# Altium PCB Full bridge-V1.00.PcbDoc (part 2 of 2)
Units mil, origin at the board's own origin, x right, y up, seen from the top; angles counter-clockwise.
Board outline 14960.63 x 6692.91 mil, 2 copper layers (Top Layer, Bottom Layer); 452 components, 175 nets, 980 pads, 0 vias.
Unrouted connection lines stored in the file: 781.
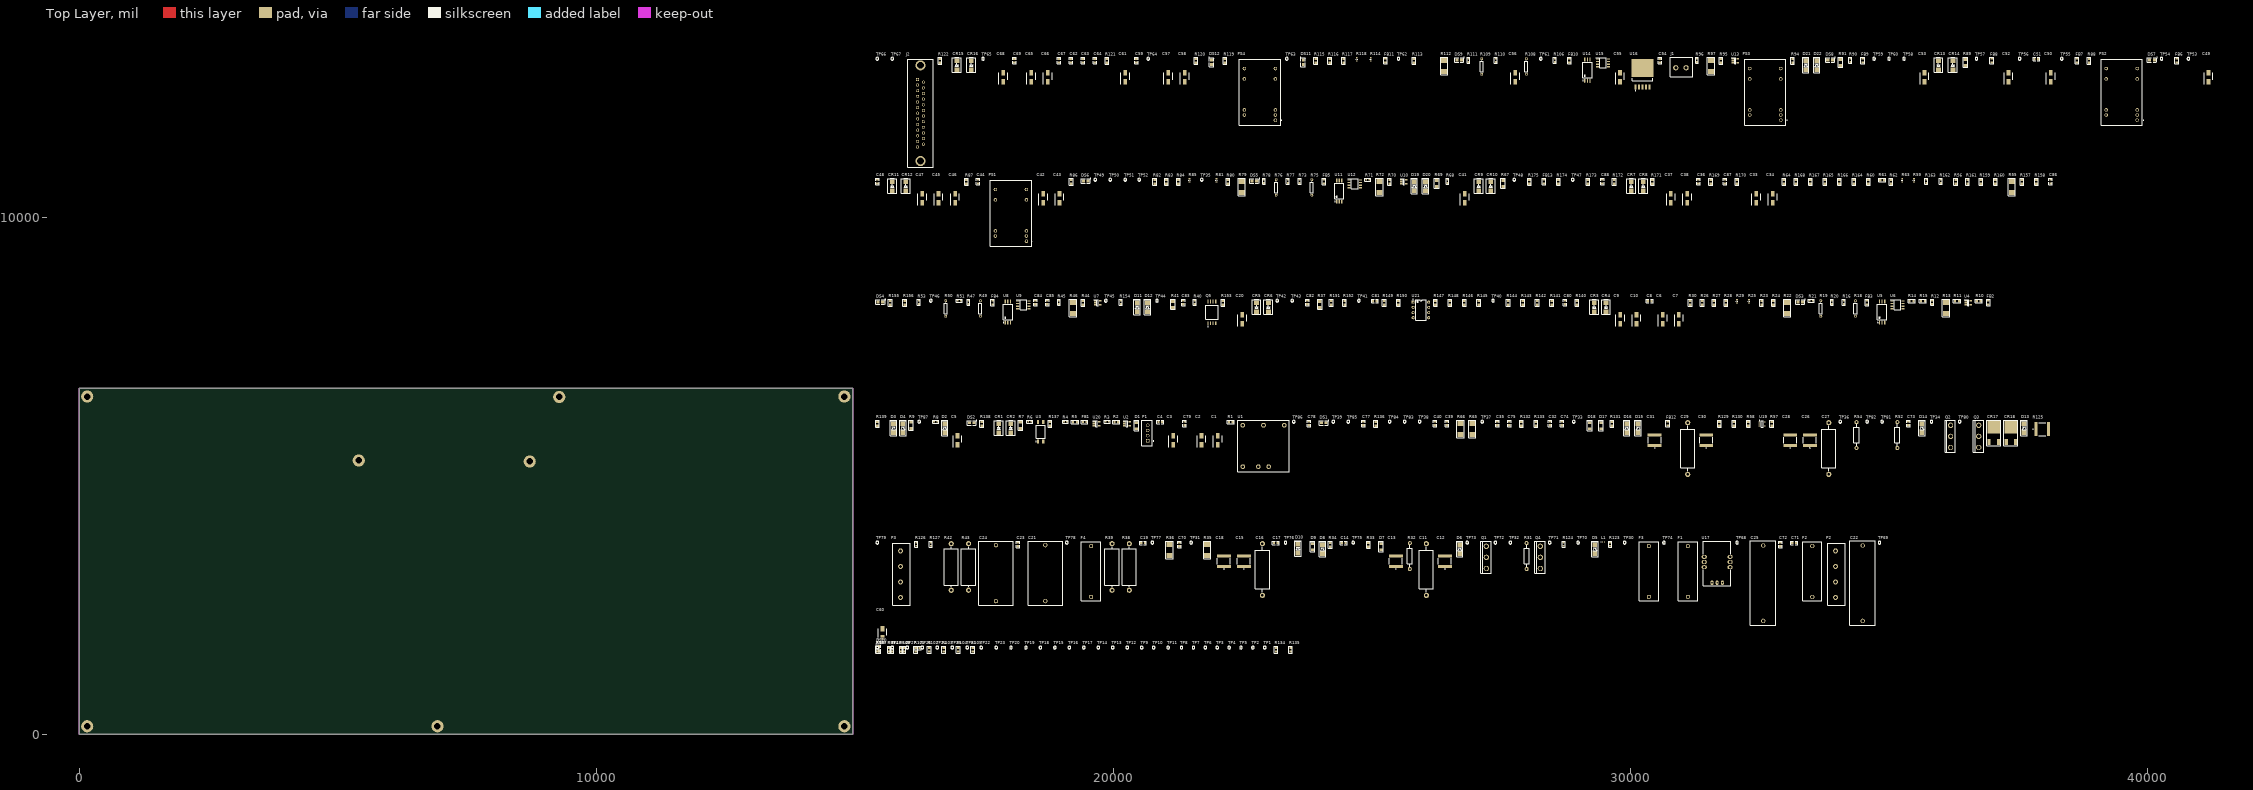
[diagram p0: Top Layer view]

## Nets (pads, with @x,y where several pads share a name; then routed paths per layer and width w, separated by ;. In a path a pad name is that pad's centre, name@x,y a point inside that pad or via, vN(x,y) a via of type N, cw(c..) or ccw(c..) an arc to the next point about the centre after c; other vN are vias at no path point)
1.65V: C79.2 R135.2 R146.1 TP86.1 U20.5
3: J2.12 TP66.1
4: J2.24 TP67.1
+3.3VD: C73.2 R2.2 R11.2 R44.2 R70.2 R95.2 R140.1 R150.2 R171.1 U19.5
+3.3VD2: C60.1 C64.2 DS10.1 R14.1 R92.2 TP26.1 U16.4 U16.5
+5V_MICRO: C69.2 C71.2 C72.2 C78.2 DS12.1 FB11.1 J2.13 J2.25 R3.1 R12.1 R15.1 R45.1 R71.1 R93.2 R96.1 R138.1 R144.1 R149.2 R172.2 TP25.1 TP63.1 U17.13 U20.1
"+12V_Digital IN": C2.1 C49.1 C52.1 C56.1 C68.1 J1.1 PS1.22 PS1.23 PS2.22 PS2.23 PS3.22 PS3.23 PS4.22 PS4.23 TP55.1 U1.1
+VDDI: R92.1 R93.1
"AC Output": F2.2 P2.1 P2.2 R141.1 TP69.1
"E FB TEMP": J2.8
Fan: C3.1 C4.2 D1.1 DS1.1 P1.1 U1.3
"Fan FB command": FB1.1 J2.23
"FB TEMP of the heatsink": FB2.2 J2.16
"Gate 1": D8.2 Q1.1 R7.2 R9.2 R19.2 R33.2 TP71.1
"Gate 2": D15.2 Q2.1 R37.2 R41.2 R50.2 R57.2 TP79.1
"Gate 3": D16.2 Q3.1 R58.2 R67.2 R69.2 R76.2 TP80.1
"Gate 4": D10.2 Q4.1 R34.2 R89.2 R91.2 R109.2 TP73.1
"GND side FB": C21.1 C24.1 C26.2 C27.2 C28.2 C29.2 C30.2 C31.2 C32.1 C35.1 C37.2 C38.2 C39.1 C40.1 C45.2 C46.2 CR7.1 CR11.1 CR17.1 D13.1 D14.1 D15.1 D16.1 D17.1 D18.1 P3.3 P3.4 Q2.3 Q3.3 R40.1 R42.2 R43.2 R51.1 R57.1 R58.1 R64.1 R65.2 R66.2 R68.1 R77.1 R86.1 R125.1 R167.2 R168.2 TP33.1 TP83.1 TP84.1 TP85.1 U9.4 U9.5 U12.4 U12.5
GND_DIGITAL: C1.2 C5.2 C20.2 C41.2 C53.2 C60.2 C62.1 C63.1 C64.1 C69.1 C71.1 C72.1 C73.1 C75.1 C77.1 C78.1 C79.1 C80.2 C82.2 C83.2 C86.2 J2.1 J2.14 Q5.5 R6.1 R10.2 R21.1 R23.2 R24.2 R25.1 R26.2 R27.2 R28.2 R29.1 R53.1 R56.2 R59.1 R60.2 R61.2 R62.2 R63.1 R78.1 R80.2 R81.1 R82.2 R83.2 R84.2 R85.1 R98.2 R99.2 R100.2 R101.2 R102.2 R103.2 R104.2 R105.2 R111.1 R113.2 R114.1 R115.2 R116.2 R117.2 R118.1 R121.2 R122.2 R124.1 R129.1 R134.2 R136.1 R137.2 R139.2 R143.2 R145.1 R160.2 R164.2 R175.2 TP8.1 TP14.1 TP20.1 TP28.1 TP29.1 TP32.1 TP38.1 TP39.1 TP48.1 TP64.1 TP87.1 U2.3 U3.2 U4.3 U5.3 U7.3 U8.3 U10.3 U11.3 U13.3 U14.3 U16.3 U16.6 U17.12 U20.2
GND_Fan: C3.2 C4.1 D2.1 P1.2 R1.2 TP2.1 U1.5
GND_GS1: C6.2 C7.2 C8.1 C19.2 C47.2 C48.1 CR2.1 PS1.16 R8.2 R20.2 R35.1 R87.2 TP6.1 TP53.1 U5.4
GND_GS2: C33.2 C34.2 C36.1 C39.2 C50.2 C51.1 CR6.1 PS2.16 R40.2 R51.2 R65.1 R88.2 TP12.1 TP56.1 U8.4
GND_GS3: C40.2 C42.2 C43.2 C44.1 C54.1 C55.2 CR10.1 PS3.16 R66.1 R68.2 R77.2 R94.2 TP18.1 TP61.1 U11.4
GND_GS4: C23.2 C57.2 C58.2 C59.1 C61.2 C67.1 CR14.1 PS4.16 R36.1 R90.2 R110.2 R119.2 TP24.1 TP65.1 U14.4
"GND_High voltage-out": L1.2 P2.3 P2.4 R151.1 R152.1 R154.2 R162.1 R163.1 TP42.1 TP74.1
GND_IN: C2.2 C49.2 C52.2 C56.2 C68.2 J1.2 PS1.2 PS1.3 PS2.2 PS2.3 PS3.2 PS3.3 PS4.2 PS4.3 TP57.1 U1.2 U3.3
"High side FB": C24.2 D5.2 D6.2 F1.2 Q1.2 Q4.2 R31.2 R32.2 R142.1 TP68.1
"Input 400V": F4.1 P3.1 P3.2 R125.2 TP31.1
"Input voltage of FB": J2.15 TP59.1
"M1 FB command": FB3.1 FB9.2 R26.1 R105.1 TP3.1 TP49.1
"M2 FB command": FB4.1 FB8.2 R60.1 R104.1 TP9.1 TP50.1
"M3 FB command": FB5.1 FB7.2 R82.1 R103.1 TP15.1 TP51.1
"M4 FB command": FB6.2 FB10.1 R102.1 R115.1 TP21.1 TP52.1
NetC1_1: C1.1 R2.1 R3.2 U2.5
NetC5_1: C5.1 R11.1 R12.2 U4.5
NetC11_1: C11.1 C12.1 C13.1 R31.1
NetC15_1: C15.1 C16.1 C18.1 R32.1
NetC20_1: C20.1 R44.1 R45.2 U7.5
NetC21_2: C21.2 CR18.1 F1.1 F4.2 R38.1 R39.1
NetC22_1: C22.1 C25.1 F2.1
NetC22_2: C22.2 C25.2 F3.2
NetC26_1: C26.1 C27.1 C28.1 R52.1
NetC30_1: C30.1 C31.1 R54.1
NetC41_1: C41.1 R70.1 R71.2 U10.5
NetC53_1: C53.1 R95.1 R96.2 U13.5
NetC62_2: C62.2 C63.2 FB11.2 U16.1 U16.2
NetC70_1: C70.1 R127.2 R131.1 U19.1
NetC70_2: C70.2 R126.1 R130.2 TP34.1 U19.4
NetC74_1: C74.1 R132.2 R133.1
NetC74_2: C74.2 R129.2 R130.1
NetC75_2: C75.2 FB12.1 R131.2 TP36.1
NetC77_2: C77.2 R133.2 R136.2 TP37.1 U19.3
NetC81_1: C81.1 Q5.6 R158.2 R159.1 TP44.1
NetC81_2: C81.2 R153.2
NetC82_1: C82.1 C83.1 Q5.8 R149.1 R150.1
NetC84_1: C84.1 Q5.2 R147.1 R148.1 R151.2 R152.2 TP41.1
NetC84_2: C84.2 C85.2 Q5.4 R154.1 R162.2 R168.1 TP46.1
NetC88_2: C88.2 R173.2 R174.1
NetCR1_1: CR1.1 CR2.2 R18.1 R30.2 TP5.1 U5.5
NetCR3_2: CR3.2 CR4.1 D3.2 D4.2 R13.1 R22.1 TP7.1 U6.6 U6.7
NetCR5_1: CR5.1 CR6.2 R49.1 R64.2 TP11.1 U8.5
NetCR7_2: CR7.2 CR8.1 D11.2 D12.2 R46.1 R55.1 TP13.1 U9.6 U9.7
NetCR9_1: CR9.1 CR10.2 R75.1 R86.2 TP17.1 U11.5
NetCR11_2: CR11.2 CR12.1 D19.2 D20.2 R72.1 R79.1 TP19.1 U12.6 U12.7
NetCR13_1: CR13.1 CR14.2 R108.1 R120.2 TP23.1 U14.5
NetCR15_2: CR15.2 CR16.1 D21.2 D22.2 R97.1 R112.1 TP27.1 U15.6 U15.7
NetCR17_2: CR17.2 CR18.2
NetD1_2: D1.2 D2.2
NetD3_1: D3.1 D4.1 R7.1 R9.1
NetD11_1: D11.1 D12.1 R37.1 R41.1
NetD19_1: D19.1 D20.1 R67.1 R69.1
NetD21_1: D21.1 D22.1 R89.1 R91.1
NetDS1_2: DS1.2 R1.1
NetDS2_1: DS2.1 R5.1 TP1.1 U2.4
NetDS2_2: DS2.2 R10.1
NetDS3_1: DS3.1 R17.1 TP4.1 U4.4
NetDS3_2: DS3.2 R28.1
NetDS4_1: DS4.1 R48.1 TP10.1 U7.4
NetDS4_2: DS4.2 R62.1
NetDS5_1: DS5.1 R74.1 TP16.1 U10.4
NetDS5_2: DS5.2 R84.1
NetDS6_2: DS6.2 R87.1
NetDS7_2: DS7.2 R88.1
NetDS8_2: DS8.2 R94.1
NetDS9_1: DS9.1 R107.1 TP22.1 U13.4
NetDS9_2: DS9.2 R117.1
NetDS10_2: DS10.2 R121.1
NetDS11_2: DS11.2 R119.1
NetDS12_2: DS12.2 R122.1
NetF3_1: F3.1 U17.8 U17.9 U17.10
NetFB1_2: FB1.2 R4.1
NetFB2_1: FB2.1 P1.4 R24.1
NetFB3_2: FB3.2 R16.1 R27.1
NetFB4_2: FB4.2 R47.1 R61.1
NetFB5_2: FB5.2 R73.1 R83.1
NetFB6_1: FB6.1 J2.21 R98.1
NetFB7_1: FB7.1 J2.9 R99.1
NetFB8_1: FB8.1 J2.22 R100.1
NetFB9_1: FB9.1 J2.10 R101.1
NetFB10_2: FB10.2 R106.1 R116.1
NetFB13_1: FB13.1 R174.2 R175.1
NetP1_3: P1.3 R14.2 R15.2
NetQ5_3: Q5.3 R163.2 R167.1
NetQ5_7: Q5.7 R153.1 R157.2 TP43.1
NetR4_2: R4.2 U2.2
NetR5_2: R5.2 U3.1
NetR6_2: R6.2 U2.1
NetR13_2: R13.2 R19.1 R22.2
NetR16_2: R16.2 U4.2
NetR17_2: R17.2 R23.1 U5.1
NetR18_2: R18.2 U6.2
NetR21_2: R21.2 U4.1
NetR25_2: R25.2 U5.2
NetR29_2: R29.2 U6.3
NetR38_2: R38.2 R42.1
NetR39_2: R39.2 R43.1
NetR46_2: R46.2 R50.1 R55.2
NetR47_2: R47.2 U7.2
NetR48_2: R48.2 R56.1 U8.1
NetR49_2: R49.2 U9.2
NetR53_2: R53.2 U7.1
NetR59_2: R59.2 U8.2
NetR63_2: R63.2 U9.3
NetR72_2: R72.2 R76.1 R79.2
NetR73_2: R73.2 U10.2
NetR74_2: R74.2 R80.1 U11.1
NetR75_2: R75.2 U12.2
NetR78_2: R78.2 U10.1
NetR81_2: R81.2 U11.2
NetR85_2: R85.2 U12.3
NetR97_2: R97.2 R109.1 R112.2
NetR106_2: R106.2 U13.2
NetR107_2: R107.2 R113.1 U14.1
NetR108_2: R108.2 U15.2
NetR111_2: R111.2 U13.1
NetR114_2: R114.2 U14.2
NetR118_2: R118.2 U15.3
NetR123_1: R123.1 R124.2 R132.1 TP30.1
NetR123_2: R123.2 U17.11
NetR126_2: R126.2 R127.1
NetR134_1: R134.1 R135.1 U19.2
NetR137_1: R137.1 U20.4
NetR138_2: R138.2 R139.1 U20.3
NetR141_2: R141.2 R142.2 R147.2 R148.2 TP40.1
NetR155_1: R155.1 R156.2
NetR156_1: R156.1 R160.1 R161.1
NetR161_2: R161.2 R166.1 R171.2 R172.1
NetR165_1: R165.1 R166.2
NetU1_6: U1.6 U3.4
"Output Current of FB to micro controller": FB12.2 J2.2
"Output voltage of FB": FB13.2 J2.3 TP47.1 TP60.1
"P1 OP37-2": R155.2 U21.1
"P2 OP37-2": C87.1 R158.1 R159.2 R169.2 R170.2 U21.2
"P3 OP37-2": C86.1 R157.1 R164.1 U21.3
"P4 OP37-2": R145.2 R146.2 U21.4
"P5 OP37-2": R143.1 U21.5
"P6 OP37-2": C87.2 C88.1 R169.1 R170.1 R173.1 TP45.1 U21.6
"P7 OP37-2": C80.1 R140.2 R144.2 U21.7
"P8 OP37-2": R165.2 U21.8
"Relay FB command": J2.11
"Source 1": C9.2 C10.2 C14.1 C15.2 C16.2 C18.2 C19.1 CR3.1 D6.1 D7.1 D8.1 D13.2 Q1.3 Q2.2 R8.1 R20.1 R30.1 R33.1 R35.2 R52.2 TP77.1 TP78.1 U6.4 U6.5 U17.1 U17.2 U17.3
"Source 4": C11.2 C12.2 C13.2 C17.1 C23.1 C29.1 C65.2 C66.2 CR15.1 D5.1 D9.1 D10.1 D14.2 L1.1 Q3.2 Q4.3 R34.1 R36.2 R54.2 R90.1 R110.1 R120.1 TP75.1 TP76.1 U15.4 U15.5
"Spare Analog FB 1": J2.4
"Spare Analog FB 2": J2.17
"Spare Analog FB 3": J2.5
"Spare Analog FB 4": J2.18
"Spare Dig FB 1": J2.20
"Spare Dig FB 2": J2.7
"Spare Dig FB 3": J2.19
"Spare Dig FB 4": J2.6
"VDD Sensor voltage out": C85.1 Q5.1
"VGS 1": C6.1 C7.1 C8.2 C9.1 C10.1 C14.2 C47.1 C48.2 CR1.2 CR4.2 D7.2 DS6.1 PS1.14 TP35.1 TP70.1 U5.6 U6.1 U6.8
"VGS 2": C32.2 C33.1 C34.1 C36.2 C37.1 C38.1 C50.1 C51.2 CR5.2 CR8.2 D17.2 DS7.1 PS2.14 TP54.1 TP81.1 U8.6 U9.1 U9.8
"VGS 3": C35.2 C42.1 C43.1 C44.2 C45.1 C46.1 C54.2 C55.1 CR9.2 CR12.2 D18.2 DS8.1 PS3.14 TP58.1 TP82.1 U11.6 U12.1 U12.8
"VGS 4": C17.2 C57.1 C58.1 C59.2 C61.1 C65.1 C66.1 C67.2 CR13.2 CR16.2 D9.2 DS11.1 PS4.14 TP62.1 TP72.1 U14.6 U15.1 U15.8
pads on no net: J2.MH1 J2.MH2 PS1.1 PS1.9 PS1.11 PS2.1 PS2.9 PS2.11 PS3.1 PS3.9 PS3.11 PS4.1 PS4.9 PS4.11 U1.4

## Keep-outs
Keep-Out Layer:
  the board outline again, w5.98